# EAGLE board pscombo (EAGLE 7.2.0)
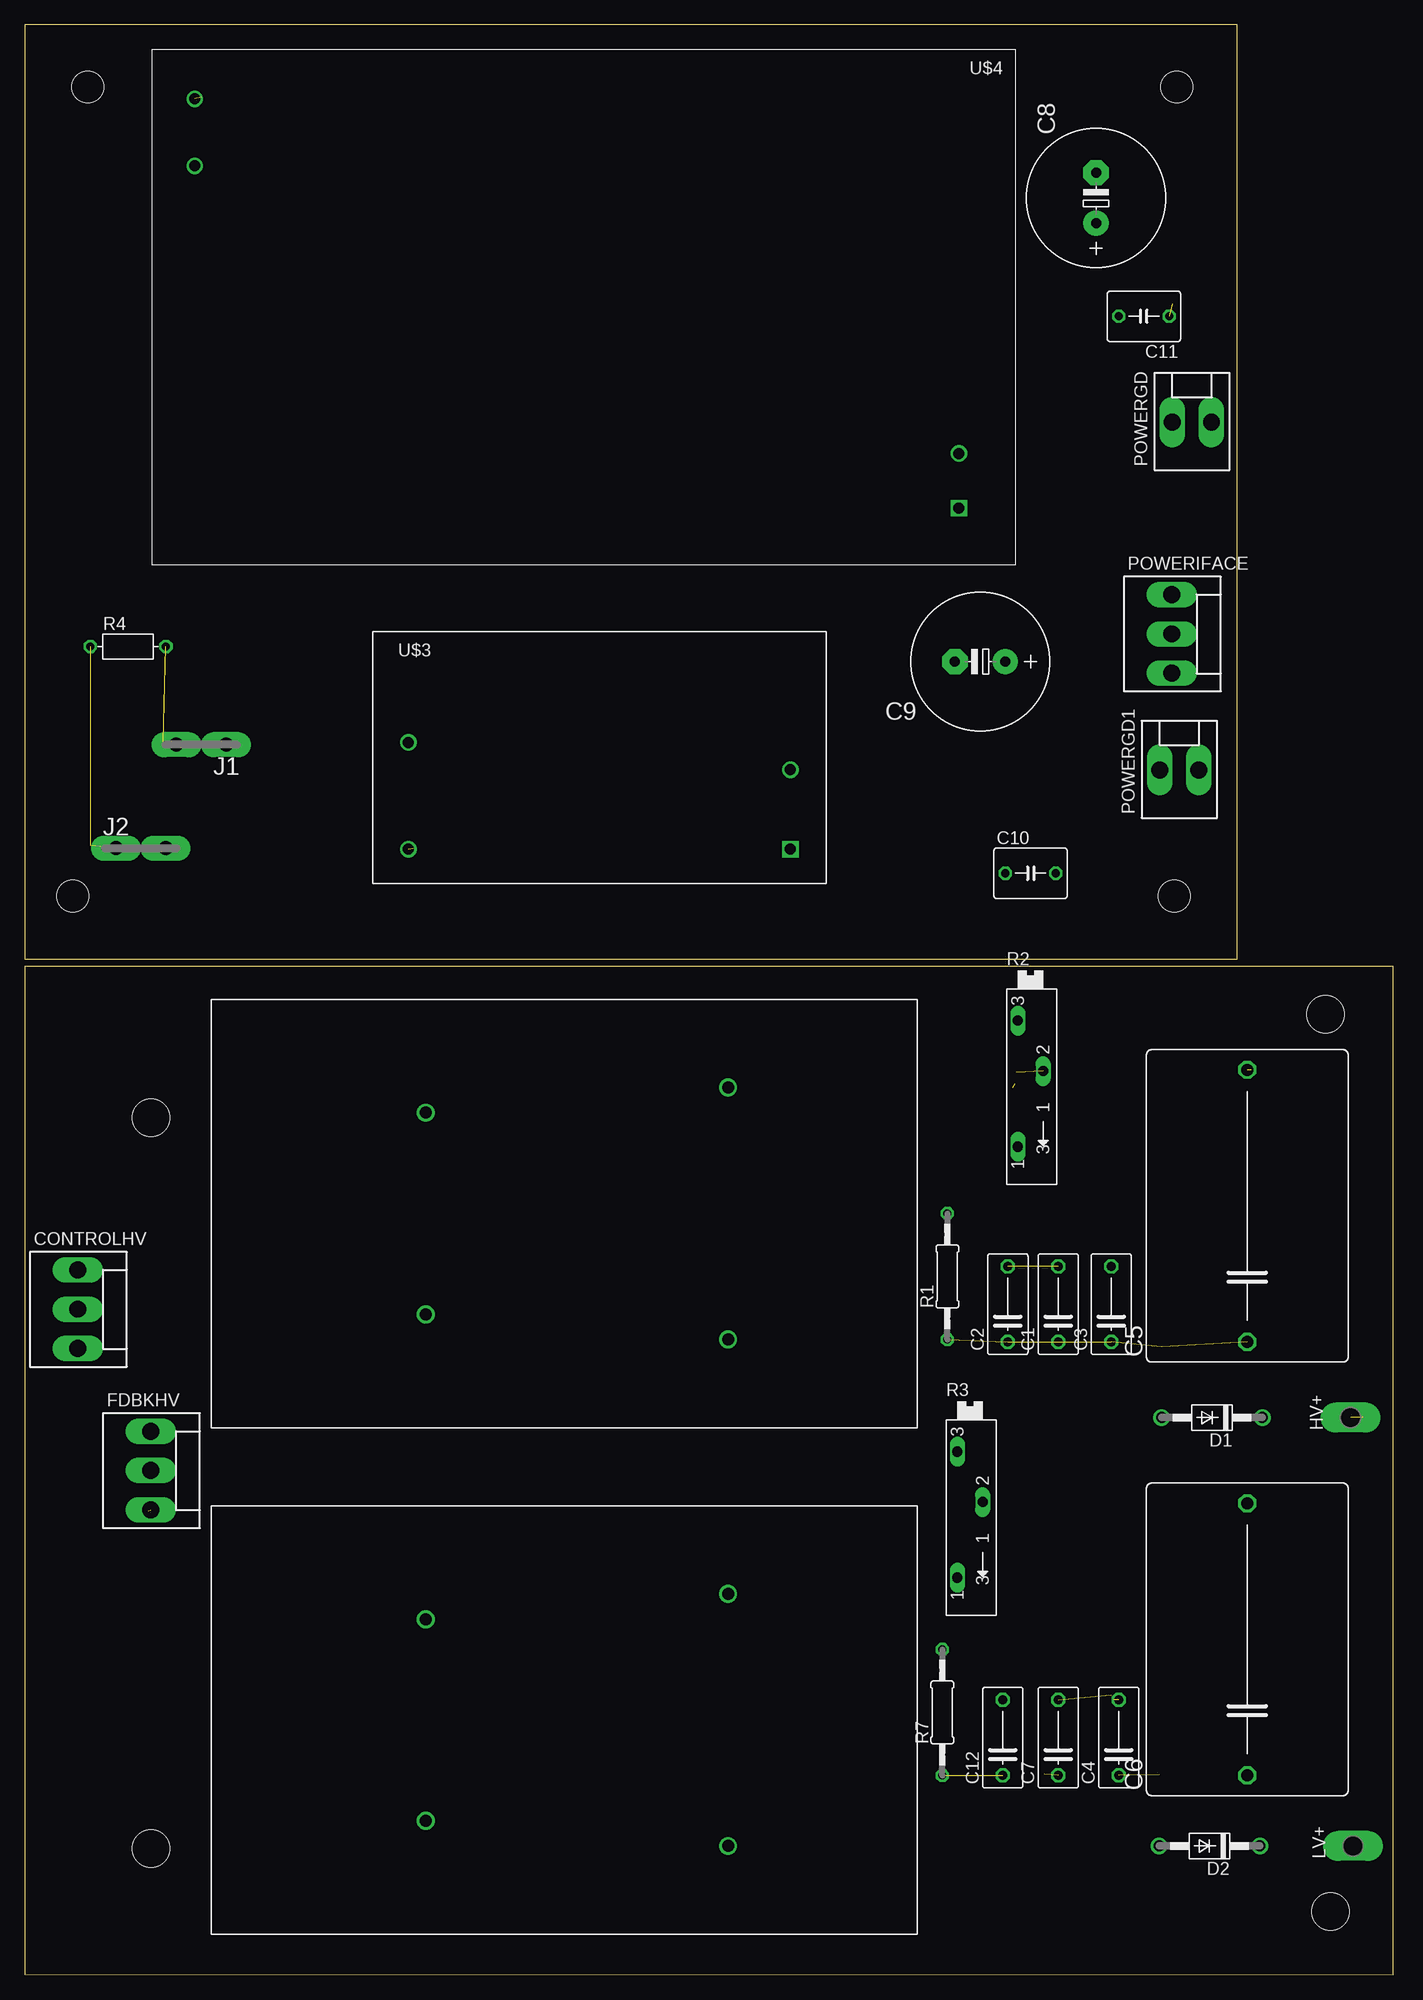
[diagram p0: board, top side]
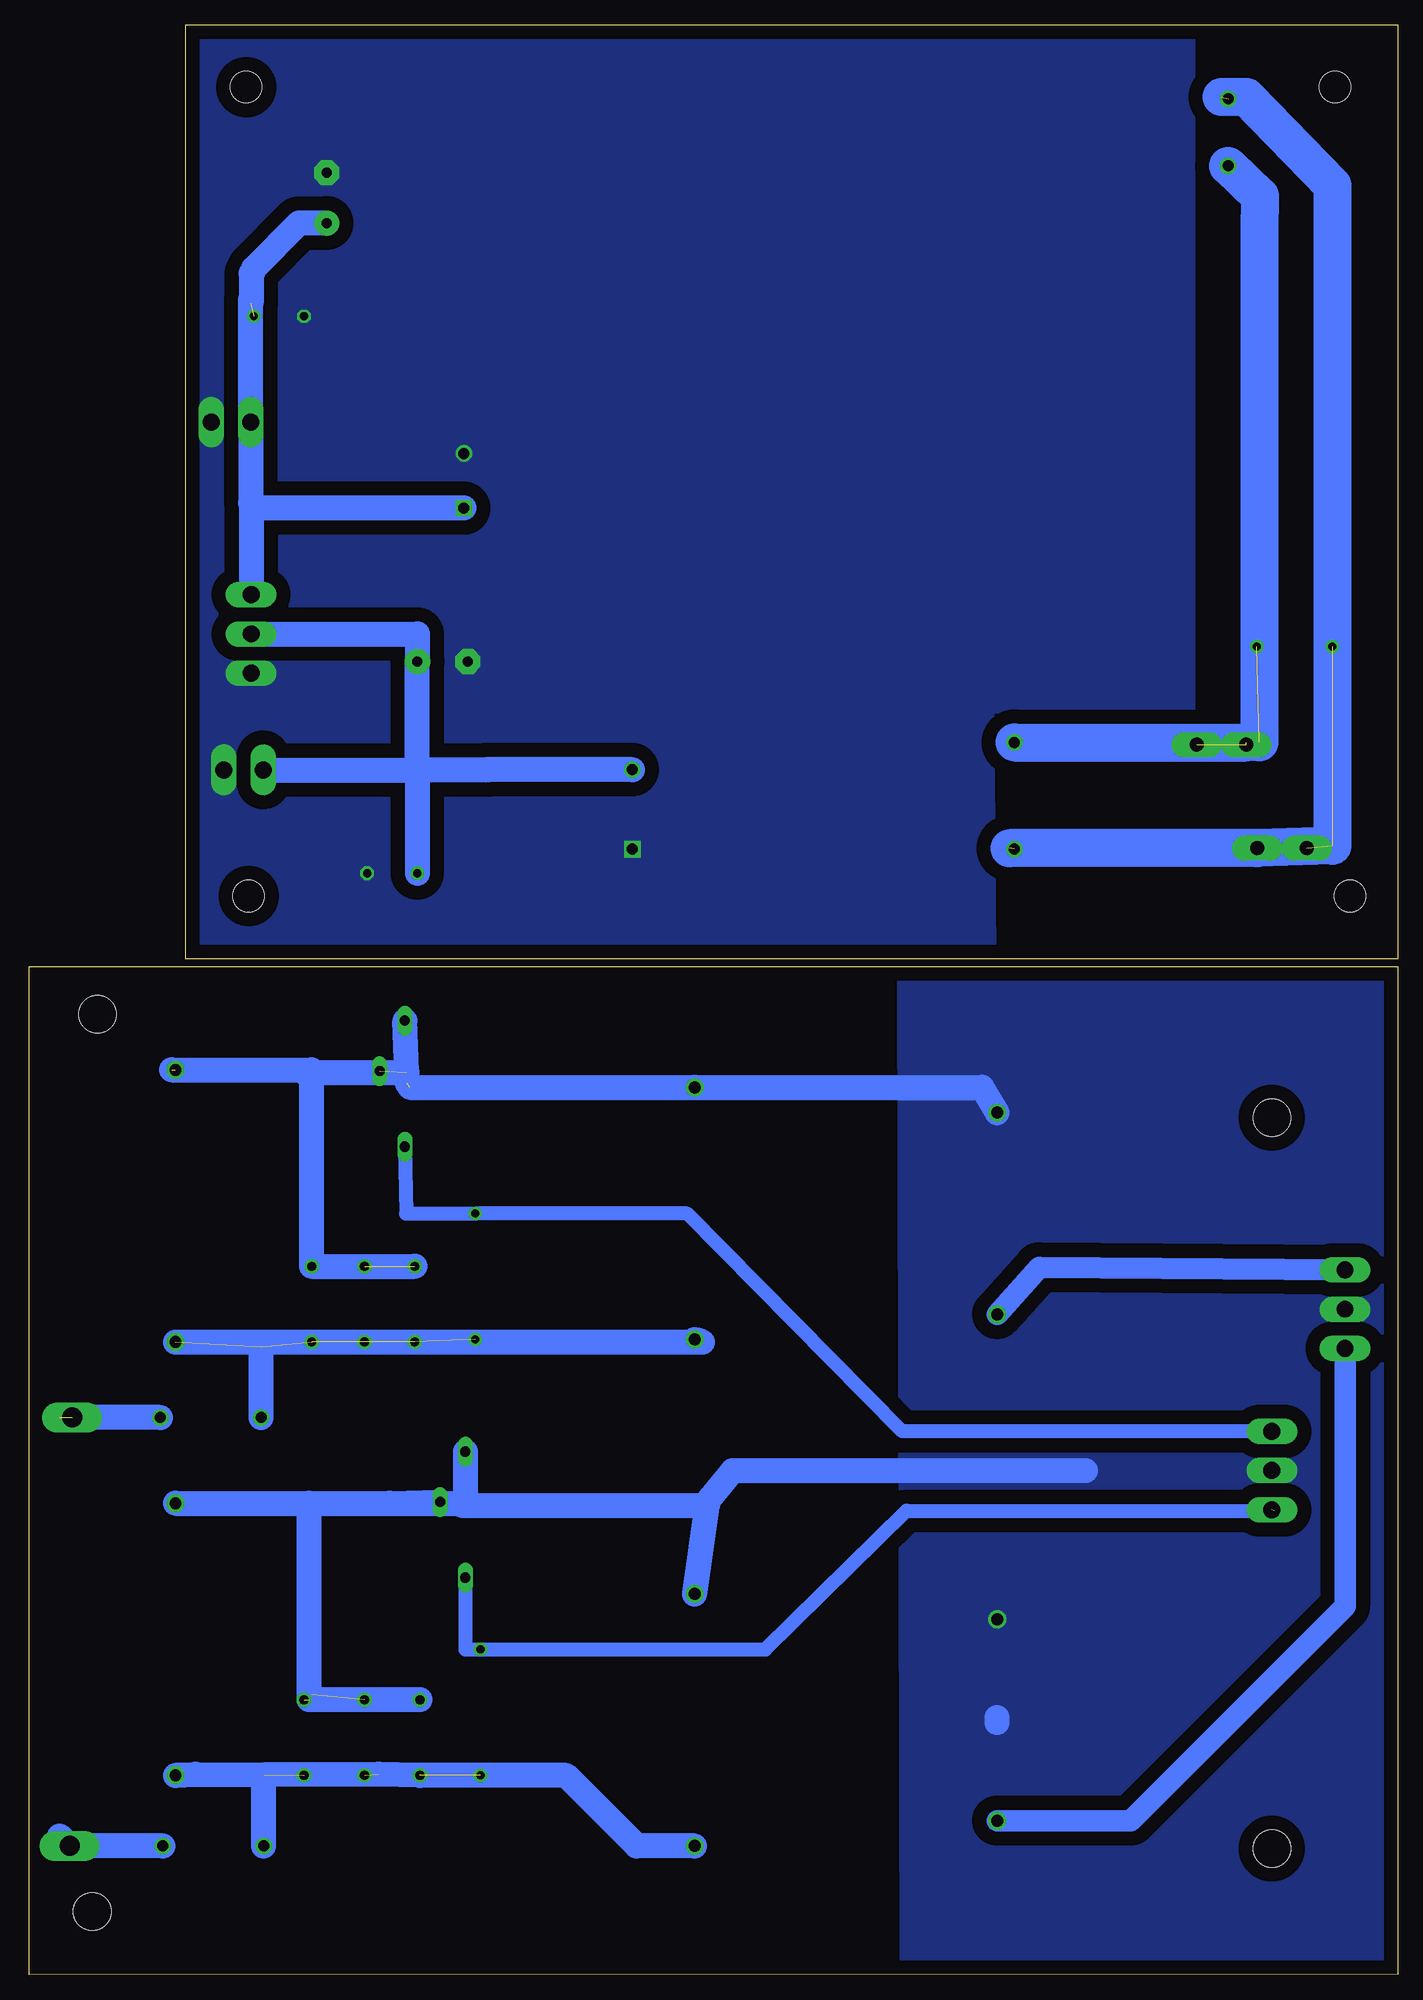
[diagram p1: board, bottom side, seen from below]

Size 137.92 x 196.54 mm. Coordinates in mm from the lower left corner, seen from the top.
Outline: 0,0.02 137.92,0 137.92,101.62 0,101.62 0,0.02
Outline: 0,102.38 122.15,102.38 122.15,196.54 0,196.54 0,102.38
Copper layers (1*16): Top 0.035mm / dielectric 1.5mm / Bottom 0.035mm
Design rules "default": minimum track width 10mil, minimum drill 24mil, track to track 8mil, track to pad 8mil, pad to pad 8mil, via to via 8mil, smd to smd 8mil, copper to edge 40mil, drill to drill 8mil, minimum pad ring 10mil, minimum via ring 8mil, stop-mask expansion 4mil, vias tented up to drill 0mil, thermal gap 10mil
Holes 3.8 mm at 131.57,6.37 131.06,96.79 12.7,12.72 12.7,86.38
Holes 3.2 mm at 116.08,190.27 115.82,108.73 6.35,190.27 4.83,108.73

## Footprints (pad centres in the part's own frame; a part is rotated, then mirrored left to right if it is on the bottom)
C075-042X103 = drill 0.914 octagon: 1 -3.81,0; 2 3.81,0
C275-205X316 = drill 1.194 octagon: 1 -13.716,0; 2 13.716,0
E5-13 = drill 1.016 pad 2.54: + -2.54,0 | drill 1.016 pad 2.54 octagon: - 2.54,0
C050-050X075 = drill 0.813 octagon: 1 -2.54,0; 2 2.54,0
KK-156-3 = drill 1.7 pad 2.184 long: 1 -3.96,0; 2 0,0; 3 3.96,0
DO41-10 = drill 1.118: A 5.08,0; C -5.08,0
P1-20Y = drill 2.007 pad 2.54 long: TP 0,0
F061.100 = drill 1.4 pad 2.54 long: A1 -2.5,0; A2 2.5,0
KK-156-2 = drill 1.7 pad 2.184 long: 1 -1.98,0; 2 1.98,0
0207/12 = drill 0.813 octagon: 1 -6.35,0; 2 6.35,0
SP19L = drill 1.016 long: A 5.715,-1.27; E -6.985,-1.27; S -1.905,1.27
R-7,5 = drill 0.813 octagon: 1 -3.81,0; 2 3.81,0
EMCO-F = drill 1.2: P$1 0,0; P$2 0,20.32; P$3 30.48,-2.54; P$4 30.48,22.86
IRM-05-05 = drill 1.1: +V 42.1,11.45; ACL 3.6,3.45; ACN 3.6,14.2 | drill 1.1 square: -V 42.1,3.45
IRM-60-12 = drill 1.1 square: P$1 5.7,46.25 | drill 1.1: P$2 5.7,40.75; P$3 82.7,5; P$4 82.7,11.75

## Placement (x,y rotation side)
C1  1n  [C075-042X103]  104.14,67.58 90 top
C2  10p  [C075-042X103]  99.06,67.58 90 top
C3  .01u  [C075-042X103]  109.47,67.58 90 top
C4  1n  [C075-042X103]  110.24,23.9 90 top
C5  1u  [C275-205X316]  123.19,77.49 90 top
C6  1u  [C275-205X316]  123.19,33.8 90 top
C7  10p  [C075-042X103]  104.14,23.9 90 top
C8  [E5-13]  107.95,179.09 90 top
C9  [E5-13]  96.27,132.35 180 top
C10  [C050-050X075]  101.35,111.02 0 top
C11  [C050-050X075]  112.78,167.15 180 top
C12  .01u  [C075-042X103]  98.55,23.9 90 top
CONTROLHV  [KK-156-3]  5.33,67.08 270 top
D1  1N4004  [DO41-10]  119.63,56.15 180 top
D2  1N4004  [DO41-10]  119.38,12.97 180 top
FDBKHV  [KK-156-3]  12.7,50.82 270 top
HV+  TPPAD1-20Y  [P1-20Y]  133.6,56.15 90 top
J1  PIN2F061.100  [F061.100]  17.78,123.97 180 top
J2  PIN2F061.100  [F061.100]  11.68,113.56 0 top
LV+  TPPAD1-20Y  [P1-20Y]  133.86,12.97 90 top
POWERGD  [KK-156-2]  117.6,156.48 0 top
POWERGD1  [KK-156-2]  116.33,121.43 0 top
POWERIFACE  [KK-156-3]  115.57,135.15 270 top
R1  2M  [0207/12]  92.96,70.38 90 top
R2  [SP19L]  101.35,89.17 270 top
R3  [SP19L]  95.25,45.74 270 top
R4  VARISTOR-7,5  [R-7,5]  10.41,133.88 0 top
R7  2M  [0207/12]  92.46,26.44 90 top
U$1  EMCO-F104PIN  [EMCO-F]  40.39,66.57 0 top
U$2  EMCO-F104PIN  [EMCO-F]  40.39,15.51 0 top
U$3  IRM-05-05  [IRM-05-05]  35.05,110 0 top
U$4  IRM-60-12  [IRM-60-12]  99.82,194.08 180 top

## Library data of the parts
C1-C12 = rcl
CONTROLHV FDBKHV POWERGD POWERGD1 POWERIFACE = con-molex; OC_FARNELL: unknown; OC_NEWARK: unknown
D1 D2 = diode
HV+ LV+ = testpad
J1 J2 = con-faston; OC_FARNELL: unknown; OC_NEWARK: unknown
R1 R7 = resistor
R2 R3 = pot
R4 = varistor
U$1 U$2 = dc-dc-converter
U$3 U$4 = meanwell

## Nets
+12V: C8.+ C11.1 POWERGD.1 POWERIFACE.1 U$4.P$1
GND: C1.2 C2.2 C3.2 C4.2 C5.2 C6.2 C7.2 C12.2 CONTROLHV.2 FDBKHV.2 R2.E R2.S R3.E R3.S U$1.P$2 U$1.P$4 U$2.P$2 U$2.P$4
GND1: C8.- C9.- C10.2 C11.2 POWERGD1.2 POWERGD.2 POWERIFACE.3 U$3.-V U$4.P$2
N$1: C1.1 C2.1 C3.1 C5.1 D1.A R1.1 U$1.P$3
N$2: C4.1 C6.1 C7.1 C12.1 D2.A R7.1 U$2.P$3
N$3: FDBKHV.1 R1.2 R2.A
N$4: CONTROLHV.1 U$1.P$1
N$5: CONTROLHV.3 U$2.P$1
N$6: D1.C HV+.TP
N$7: D2.C LV+.TP
N$8: FDBKHV.3 R3.A R7.2
N$9: J1.A1 J1.A2 R4.2 U$3.ACN U$4.P$4
N$10: J2.A1 J2.A2 R4.1 U$3.ACL U$4.P$3
VCC: C9.+ C10.1 POWERGD1.1 POWERIFACE.2 U$3.+V

## Tracks (layer width: path | path; a pad name or v marks a point on that pad's centre or on a via)
+12V  (1 unrouted)
  Bottom 2.54: 115.62,168.42 POWERGD.1 115.62,148.36 | 115.62,168.42 115.62,168.88 | C8.+ 110.74,176.55 115.32,171.98 115.32,171.72 115.57,171.47 115.57,168.47 115.62,168.42 | U$4.P$1 115.09,147.83 115.62,148.36 | 115.62,148.36 115.57,148.36 POWERIFACE.1
GND  (6 unrouted)
  Bottom 2.54: U$1.P$2 41.91,89.43 U$1.P$4 99.57,89.43 | 109.47,90.7 C3.2 C2.2 | 40.39,25.42 40.39,25.93 | 123.57,91.21 109.47,91.21 109.47,90.95 | 99.82,89.81 99.87,90.97 | 99.87,90.97 R2.E | 69.6,47.26 69.34,48.03 67.06,50.82 31.5,50.82 | R3.E 93.98,47.52 94.23,47.26 | U$2.P$4 69.6,47.26 | 69.6,47.26 94.23,47.26 | C6.2 109.73,47.52 | 109.73,47.52 101.6,47.52 | 101.6,47.52 R3.S | C12.2 109.73,27.71 | 109.47,28.21 109.73,27.71 | 109.73,27.71 109.73,47.52 | 101.6,47.52 94.49,47.52 94.23,47.26 | 109.47,90.95 109.47,90.7 | 109.47,90.7 109.73,90.44 109.73,90.7 109.47,90.95 | 109.47,90.95 99.89,90.95 99.87,90.97
  pour Bottom (isolate 1.422, no thermals): 0,101.37 50.29,101.37 50.04,0.27 0,0.02
GND1
  pour Bottom (isolate 1.422, no thermals): 41.4,196.62 122.17,196.36 122.17,102.38 40.64,102.38
N$1  (5 unrouted)
  Bottom 2.54: C5.1 70.1,63.77 U$1.P$3 | D1.A 114.55,63.27
N$2  (3 unrouted)
  Bottom 2.54: 114.3,20.14 102.74,20.21 C12.1 83.82,20.09 76.71,12.97 U$2.P$3 | 114.3,20.14 C6.1 121.16,20.21 | D2.A 114.3,20.14
N$3
  Bottom 1.422: FDBKHV.1 49.93,54.78 71.63,76.73 R1.2 99.95,76.73 R2.A
N$4
  Bottom 2.184: CONTROLHV.1 36.17,71.29 U$1.P$1
N$5
  Bottom 2.184: CONTROLHV.3 5.33,37.1 26.92,15.51 U$2.P$1
N$6  (1 unrouted)
  Bottom 2.54: D1.C 134.87,56.15
N$7
  Bottom 2.54: D2.C LV+.TP 134.87,13.99
N$8  (1 unrouted)
  Bottom 1.422: R3.A 93.98,32.79 R7.2 63.75,32.79 49.53,46.76 12.45,46.76 11.94,47.01
N$9  (3 unrouted)
  Bottom 3.81: U$3.ACN 15.26,124.2 13.97,124.23 13.97,175.53 13.9,179.28 U$4.P$4
N$10  (4 unrouted)
  Bottom 3.81: 39.16,113.56 J2.A2 6.6,113.81 6.6,180.36 15.24,189.25 17.78,189.25
N$11
  pour Bottom (isolate 1.422, no thermals): 20.57,196.11 42.42,196.11 42.67,127.27 20.57,127.53
VCC
  Bottom 2.54: U$3.+V 91.95,121.45 91.69,121.43 98.81,121.43 | 98.81,121.43 C9.+ 98.81,135.15 POWERIFACE.2 | 98.81,121.43 C10.1 | POWERGD1.1 98.81,121.43